# Altium PCB Master.PcbDoc
Units mil, origin at the board's own origin, x right, y up, seen from the top; angles counter-clockwise.
Board outline 6000 x 4000 mil, 2 copper layers (Top Layer, Bottom Layer); 26 components, 32 nets, 130 pads, 0 vias.
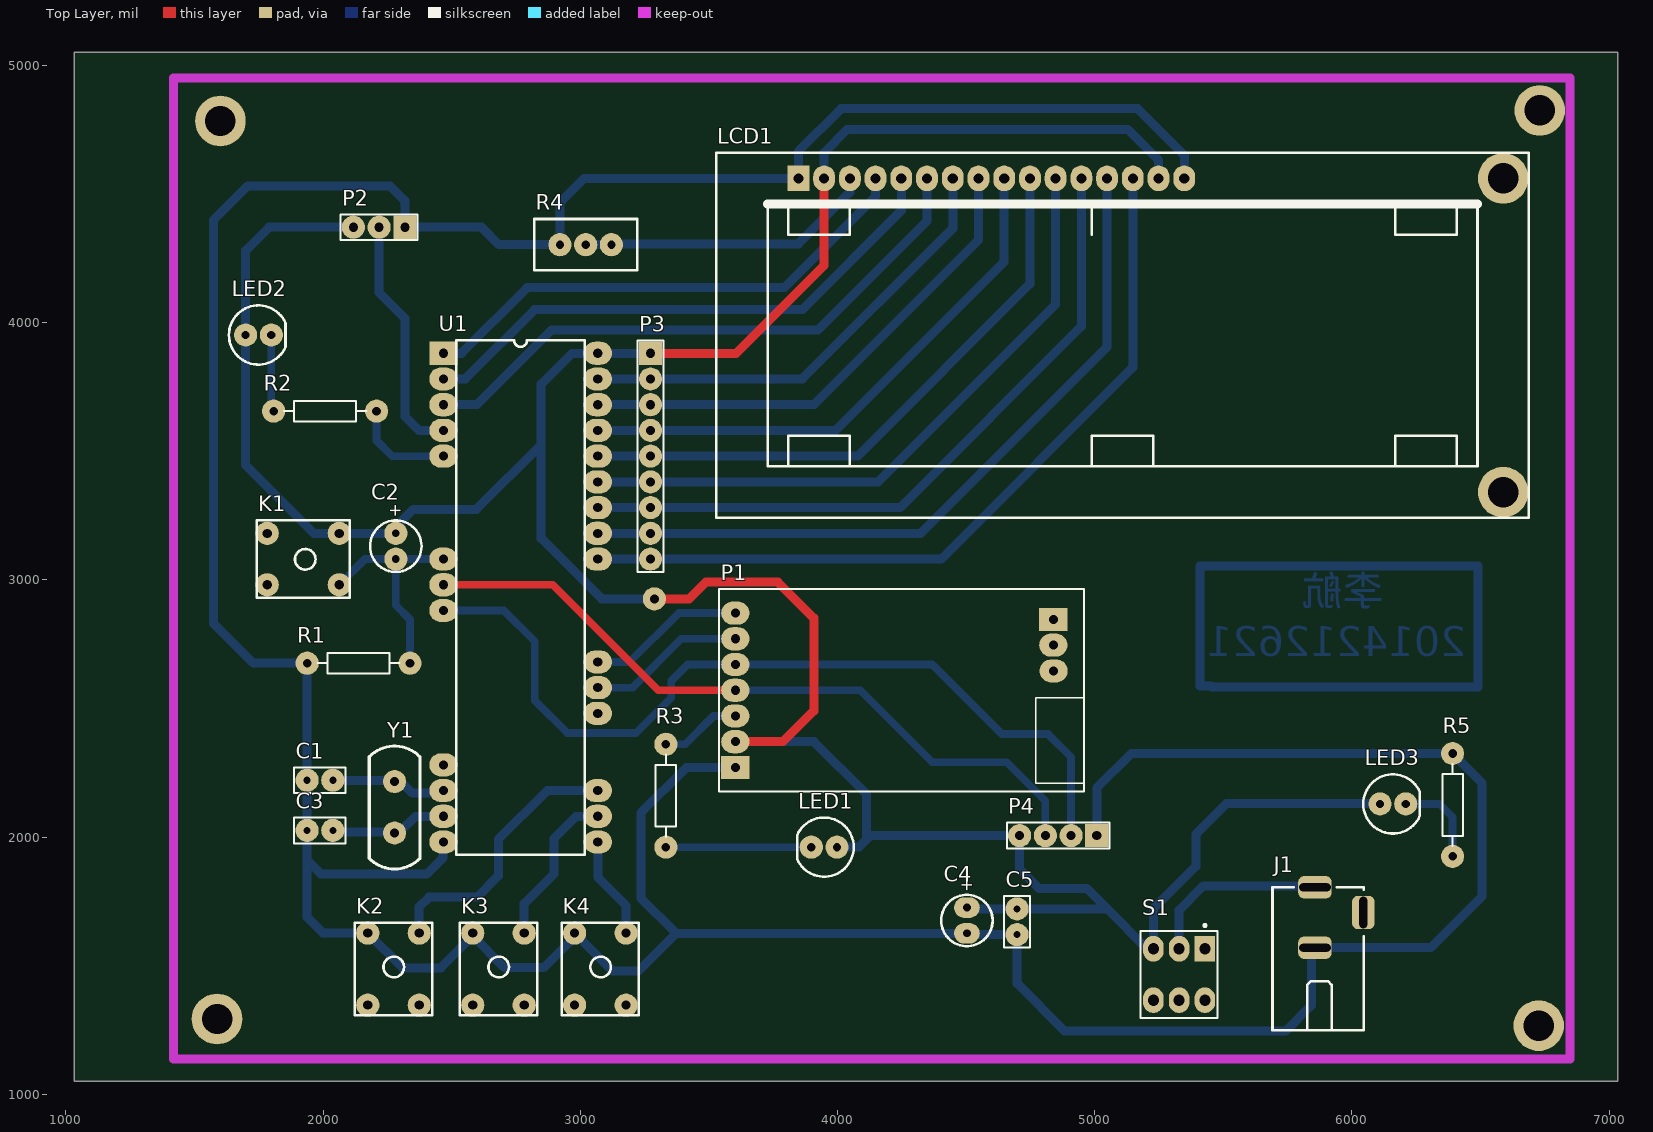
[diagram p0: Top Layer view]
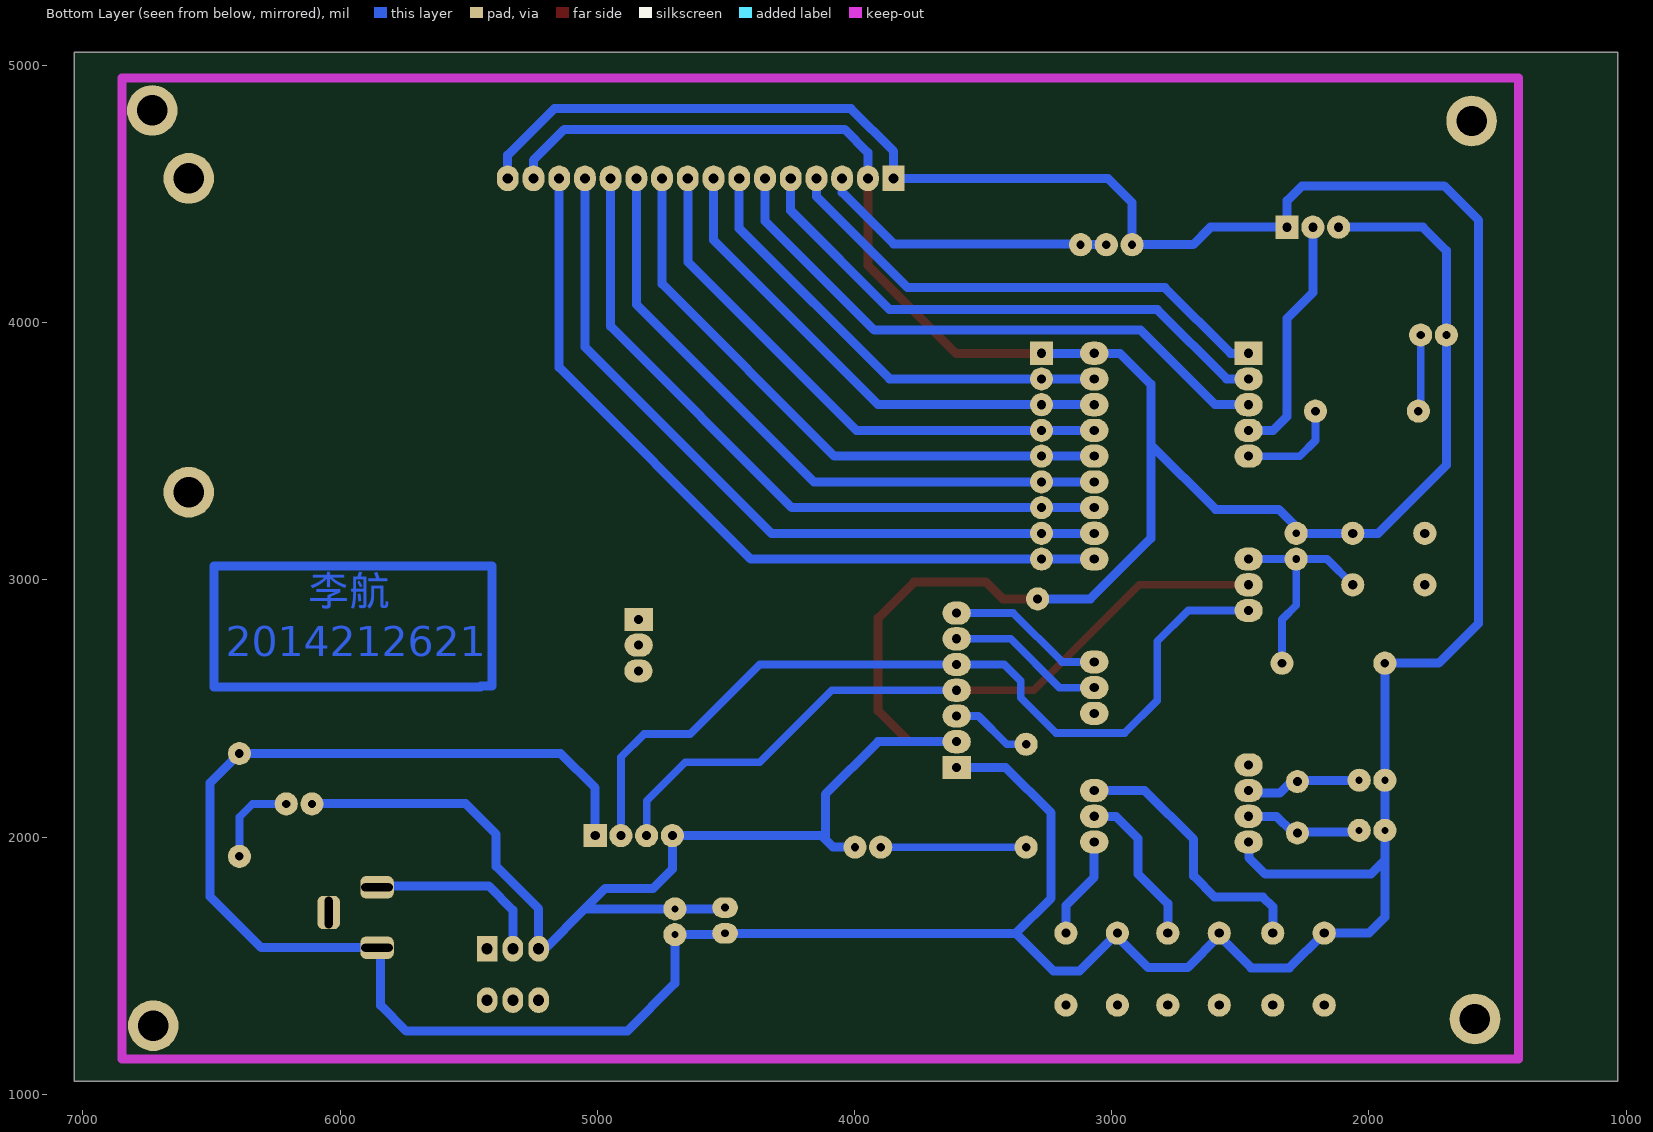
[diagram p1: Bottom Layer view, seen from below]

## Layer stack, top to bottom
Top Layer: signal copper 1.4
Dielectric: dielectric 12.6, FR-4, Dk 4.8
Bottom Layer: signal copper 1.4

## Board outline
1033,1051 7033,1051 7033,5051 1033,5051

## Design rules (kind name [scope] priority, off if disabled: settings)
Clearance [All] p1: gap=10
PolygonConnect [All] p1: connectstyle=Relief reliefconductorwidth=10 reliefentries=4 polygonreliefangle="90 Angle" airgapwidth=10
RoutingVias [All] p1: holewidth=28 width=50 viastyle="Through Hole" minholewidth=28 minwidth=50 maxholewidth=28 maxwidth=50
SolderMaskExpansion [All] p1: expansion=4
Width [All] p1: maxlimit=40 minlimit=10 preferedwidth=30
28 further rules are at their usual default settings.

## Components (designator, comment, footprint, x,y, rotation, side; value= is the part's Value field where it differs from the comment)
C1 "Cap" RAD-0.1 1988,2221 r180 top
C2 "Cap Pol1" RB.1/.2#1 2283,3131 r90 top
C3 "Cap" RAD-0.1 1988,2026 r180 top
C4 "Cap Pol1" RB.1/.2#2 4503,1676 r90 top
C5 "Cap" RAD-0.1 4698,1671 r90 top
J1 "DC-05" DC-05 5856,1805 r0 top
K1 "四脚按键" 四脚按键 2063,3181 r270 top locked
K2 "四脚按键" 四脚按键 2174,1627 r0 top
K3 "四脚按键" 四脚按键 2582,1627 r0 top
K4 "四脚按键" 四脚按键 2978,1627 r0 top
LCD1 "LCD1602" LCD1602 3848,4561 r0 top
LED1 "LED" LED 3998,1961 r180 top
LED2 "LED" LED 1699,3952 r0 top
LED3 "LED" LED 6109,2129 r0 top
P1 "无线串口模块" AS32-TTL-100 3603,2271 r0 top
P2 "蜂鸣器" HDR1X3 2318,4371 r180 top
P3 "排阻" HDR1X9 3273,3881 r270 top
P4 "Header 4" HDR1X4 5008,2006 r180 top
R1 "Res2" AXIAL-0.4 2138,2676 r0 top
R2 "Res2" AXIAL-0.4 2008,3656 r180 top
R3 "Res2" AXIAL-0.4 3333,2161 r270 top
R4 "RPot" RPot 3121,4303 r180 top (schematic designator R?)
R5 "Res2" AXIAL-0.4 6391,2125 r90 top
S1 "SW-DPDT" SWITCH_B1 5328,1466 r270 top
U1 "STC89C51" DIP-40 2468,3881 r0 top
Y1 "XTAL" XTAL 2278,2116 r90 top (schematic designator 1)

## Footprints (in the part's own frame and the unit in brackets; to place one, negate y for a bottom-side part, rotate by r counter-clockwise, add the part's x,y. Pads: shape width x height; smd on the part's side, far side on the other; paste and mask are expansions set on the pad)
AS32-TTL-100 [mil]
  rect 110x90 hole 35.43 mask+1.97: 1(0,0) 1(1236.22,575.59)
  oval 110x90 hole 35.43 mask+1.97: 2(0,100) 2(1236.22,475.59) 3(0,200) 4(0,300) 5(0,400) 6(0,500) 7(0,600)
  silkscreen extent -63,-94 1355,694
AXIAL-0.4 [mil] "Axial Device, Thru-Hole; 2 Leads; 0.4 in Pin Spacing"
  round 90 hole 33.46: 1(-200,0) 2(200,0)
  silkscreen extent -160,-40 160,40
DC-05 [mil]
  rrect50% 129.92x86.61 hole 30 slot 122.05 at 0 deg: 1(0,0) 2(0,-235)
  rrect50% 86.61x129.92 hole 30 slot 122.05 at 90 deg: 3(188,-98)
  silkscreen extent -165,-555 190,0
DIP-40 [mil]
  rect 110x90 hole 35.43: 1(0,0)
  oval 110x90 hole 35.43: 2(0,-100) 3(0,-200) 4(0,-300) 5(0,-400) 9(0,-800) 10(0,-900) 11(0,-1000) 17(0,-1600) 18(0,-1700) 19(0,-1800) 20(0,-1900) 21(600,-1900) 22(600,-1800) 23(600,-1700) 26(600,-1400) 27(600,-1300) 28(600,-1200) 32(600,-800) 33(600,-700) 34(600,-600) 35(600,-500) 36(600,-400) 37(600,-300) 38(600,-200) 39(600,-100) 40(600,0)
  silkscreen extent 50,-1950 550,50
HDR1X3 [mil] "Connector; Header; 3 Position"
  rect 90x90 hole 35.43: 1(0,0)
  round 90 hole 35.43: 2(100,0) 3(200,0)
  silkscreen extent -50,-50 250,50
HDR1X4 [mil] "Connector; Header; 4 Position"
  rect 90x90 hole 35.43: 1(0,0)
  round 90 hole 35.43: 2(100,0) 3(200,0) 4(300,0)
  silkscreen extent -50,-50 350,50
HDR1X9 [mil] "Connector; Header; 9 Position"
  rect 90x90 hole 35.43: 1(0,0)
  round 90 hole 35.43: 2(100,0) 3(200,0) 4(300,0) 5(400,0) 6(500,0) 7(600,0) 8(700,0) 9(800,0)
  silkscreen extent -50,-50 850,50
LCD1602 [mm]
  round 5 hole 3: 0(69.596,-30.988) 0(69.596,0)
  rect 2.159x2.54 hole 1: 1(0,0)
  oval 2.159x2.54 hole 1: 2(2.54,0) 3(5.08,0) 4(7.62,0) 5(10.16,0) 6(12.7,0) 7(15.24,0) 8(17.78,0) 9(20.32,0) 10(22.86,0) 11(25.4,0) 12(27.94,0) 13(30.48,0) 14(33.02,0) 15(35.56,0) 16(38.1,0)
  silkscreen extent -8.13,-33.53 72.14,2.54
LED [mil]
  round 90 hole 32: 1(0,0) 2(100,0)
  silkscreen extent -65,-115 155,115
RAD-0.1 [mil] "Radial Cap, Thru-Hole; 2 Leads; 0.1 in Pin Spacing"
  round 90 hole 27.56: 1(-50,0) 2(50,0)
  silkscreen extent -100,-50 100,50
RB.1/.2#1 [mil]
  round 90 hole 30: 1(50,0) 2(-50,0)
  silkscreen extent -100,-100 100,100
RB.1/.2#2 [mil]
  oval 80x100 hole 30: 1(50,0) 2(-50,0)
  silkscreen extent -100,-100 100,100
RPot [mil] "RPot"
  round 90 hole 32: 1(0,0) 2(100,0) 3(200,0)
  silkscreen extent -100,-100 300,100
SWITCH_B1 [mil] "单刀"
  rect 100x80 hole 43.31: 1(-100,100)
  oval 100x80 hole 43.31: 2(-100,0) 3(-100,-100) 4(100,-100) 5(100,0)
  silkscreen extent -195,-150 169,150
XTAL [mil]
  round 90 hole 35.43: 1(-100,0) 2(100,0)
  silkscreen extent -240,-100 238,100
四脚按键 [mil]
  round 90 hole 35.43: 1(0,0) 2(200,0) 3(0,-280) 4(200,-280)
  silkscreen extent -50,-320 250,40

## Part data
C1 C3 C5: "Capacitor"
C2 C4: "Polarized Capacitor (Radial)"
P1: library part "Header 7", "Header, 7-Pin"
P2: library part "Header 3", "Header, 3-Pin"
P3: library part "Header 9", "Header, 9-Pin"
P4: "Header, 4-Pin"
R1 R2 R3 R5: "Resistor"
R4: library part RPOT
S1: "单刀双掷开关"
Y1: "Crystal Oscillator"

## Free pads (board coordinates)
  round 196.85 hole 118.11: 1(1601,4784) 2(6730,4825) 3(1588,1293) 4(6726,1267)
  round 90 hole 35: 1(3288,2926)
  oval 110x90 hole 35.43: 3(4840,2646)
  oval 80x100 hole 43.31: 6(5428,1366)

## Nets (pads, with @x,y where several pads share a name; then routed paths per layer and width w, separated by ;. In a path a pad name is that pad's centre, name@x,y a point inside that pad or via, vN(x,y) a via of type N, cw(c..) or ccw(c..) an arc to the next point about the centre after c; other vN are vias at no path point)
5V: J1.1 S1.2 | length 719.3
  Bottom Layer w35: S1.2 5328,1716 5422.37,1810.37 5850.63,1810.37 J1.1
AUX: P1.3 R3.1 | length 306.8
  Bottom Layer w30: R3.1@3363,2361 3408,2361 3518,2471 P1.3 P1.3@3588,2486
BEEP: P2.2 U1.4 | length 949.2
  Bottom Layer w35: P2.2 2218,4117 2319,4016 2319,3635 2373,3581 U1.4
D0: LCD1.7 P3.2 U1.39 | length 1817.3
  Bottom Layer w35: U1.39 P3.2 3863,3781 4448,4366 LCD1.7
D1: LCD1.8 P3.3 U1.38 | length 1985.1
  Bottom Layer w35: U1.38 P3.3 3908,3681 4548,4321 LCD1.8
D2: LCD1.9 P3.4 U1.37 | length 2176.3
  Bottom Layer w35: U1.37 P3.4 3993,3581 4648,4236 LCD1.9
D3: LCD1.10 P3.5 U1.36 | length 2367.5
  Bottom Layer w35: U1.36 P3.5 4078,3481 4748,4151 LCD1.10
D4: LCD1.11 P3.6 U1.35 | length 2555.8
  Bottom Layer w35: U1.35 P3.6 4158,3381 4848,4071 LCD1.11
D5: LCD1.12 P3.7 U1.34 | length 2747
  Bottom Layer w35: U1.34 P3.7 4243,3281 4948,3986 LCD1.12
D6: LCD1.13 P3.8 U1.33 | length 2935.3
  Bottom Layer w35: U1.33 P3.8 4323,3181 5048,3906 LCD1.13
D7: LCD1.14 P3.9 U1.32 | length 3123.6
  Bottom Layer w35: U1.32 P3.9 4403,3081 5148,3826 LCD1.14
E: LCD1.6 U1.3 | length 2341.2
  Bottom Layer w35: U1.3 2598,3681 2888,3971 3923,3971 4348,4396 LCD1.6
GND: C1.2 C3.2 C4.2 C5.1 J1.2 K2.1 K3.1 K4.1 LCD1.1 LCD1.16 P1.1@3603,2271 P2.1 P4.1 R1.1 R4.3 R5.2 U1.20 | length 16889.3
  Bottom Layer w35: U1.20@2467,1976 2467,1920 2403,1856 1993,1856 1938,1911 ; P1.1@3603,2271 3413,2271 3236,2094 3236,1763 3373,1626 ; P4.1 5008,2191 5142,2325 R5.2 6506,2210 6506,1770 6306,1570 J1.2 5842,1556 5842,1346 5742,1246 4883,1246 4698,1431 C5.1 4498,1621 C4.2 3373,1626 ; LCD1.16@5348,4561.47 5348,4651 5167,4832 4014,4832 3848,4666 LCD1.1 3015,4561 2921,4467 R4.3 2684,4303 2616,4371 P2.1 2318,4474 2260,4532 1708,4532 1574,4398 1574,2831 1729,2676 R1.1 C1.2 C3.2 1938,1911 ; 1938,1911 1938,1689 2000,1627 K2.1 2309,1492 2458,1492 2582,1616 2705,1493 2858,1493 2978,1613 K4.1 3125,1480 3227,1480 3373,1626
KEY1: K2.2 U1.23 | length 1066.4
  Bottom Layer w35: K2.2 2374,1729 2412,1767 2600,1767 2682,1849 2682,1991 2872,2181 U1.23
KEY2: K3.2 U1.22 | length 621.7
  Bottom Layer w35: K3.2 2782,1741 2898,1857 2898,1995 2984,2081 U1.22
KEY3: K4.2 U1.21 | length 399.6
  Bottom Layer w35: U1.21 3068,1844 3178,1734 K4.2
LED1: R2.1 U1.5 | length 399.3
  Bottom Layer w30: R2.1 2208,3542 2269,3481 U1.5
M0: P1.7 U1.28 | length 613.7
  Bottom Layer w30: U1.28 3193,2681 3383,2871 P1.7
M1: P1.6 U1.27 | length 613.7
  Bottom Layer w30: U1.27 3203,2581 3393,2771 P1.6
NetC2_2: 
NetLED1_2: LED1.2 R3.2 | length 565
  Bottom Layer w30: R3.2 LED1.2
NetLED2_2: LED2.2 R2.2 | length 299.7
  Bottom Layer w30: LED2.2 1799,3665 R2.2
NetLED3_2: LED3.2 R5.1 | length 356.1
  Bottom Layer w30: LED3.2 6340,2129 6391,2078 R5.1
RESET: C2.2 K1.2 R1.2 U1.9 | length 874.2
  Bottom Layer w30: K1.2 2163,3081 C2.2 ; R1.2 2338,2846 2283,2901 C2.2 ; U1.9 C2.2
RS: LCD1.4 U1.1 | length 2026.8
  Bottom Layer w30: U1.1@2468,3871 2478,3871 U1.1
  Bottom Layer w35: U1.1 2538,3881 2793,4136 3793,4136 4148,4491 LCD1.4
RW: LCD1.5 U1.2 | length 2176.3
  Bottom Layer w35: U1.2 2553,3781 2823,4051 3863,4051 4248,4436 LCD1.5
RX: P1.4 P4.3 U1.10 | length 2822.9
  Top Layer w30: U1.10 2893,2981 3303,2571 P1.4
  Bottom Layer w30: P1.4 4088,2571 4368,2291 4658,2291 4808,2141 P4.3
TX: P1.5 P4.2 U1.11 | length 3374.3
  Bottom Layer w30: U1.11 2703,2881 2823,2761 2823,2531 2949,2405 3217,2405 3354,2542 3354,2607 3418,2671 P1.5 4368,2671 4638,2401 4818,2401 4908,2311 P4.2
VCC: C2.1 C4.1 C5.2 K1.1 LCD1.2 LCD1.15 LED1.1 LED2.1 LED3.1 P1.2@3603,2371 P2.3 P3.1 P4.4 pad.1@3288,2926 S1.3 U1.40 | length 12528.8
  Top Layer w35: P3.1 3606,3881 3948,4223 LCD1.2 ; pad.1@3288,2926 3423,2926 3488,2991 3768,2991 3908,2851 3908,2491 3788,2371 P1.2@3603,2371 ; C4.1 C4.1@4508,1721
  Bottom Layer w35: P2.3 1790,4371 1699,4280 LED2.1 1699,3446 1964,3181 K1.1 C2.1 ; C2.1@2283,3206 2351,3274 2596,3274 2848,3526 ; P3.1 U1.40 2968,3881 2848,3761 2848,3526 ; pad.1@3288,2926 3083,2926 2848,3161 2848,3526 ; P1.2@3603,2371 3908,2371 4113,2166 4113,1991 ; LCD1.2 3948,4661 4038,4751 5128,4751 5248,4631 LCD1.15@5248,4561.47 ; LED1.1 4083,1961 4113,1991 ; C4.1@4508,1721 C5.2 5048,1721 ; LED3.1 6107,2131 5513,2131 5393,2011 5393,1886 5228,1721 S1.3 5203,1566 5048,1721 ; 4113,1991 4128,2006 P4.4 4708,1876 4783,1801 4968,1801 5048,1721
VO: LCD1.3 R4.1 R4.2 | length 1143.3
  Bottom Layer w35: R4.2 R4.1 ; R4.1@3143,4306 3848,4306 4048,4506 LCD1.3 LCD1.3@4048,4560.53
XTAL1: C3.1 U1.19 Y1.1 | length 457.8
  Bottom Layer w30: C3.1 C3.1@2044,2020
  Bottom Layer w35: C3.1@2044,2020 2299,2020 2360,2081 U1.19
XTAL2: C1.1 U1.18 Y1.2 | length 454.9
  Bottom Layer w30: U1.18@2458,2171 U1.18
  Bottom Layer w35: C1.1 2297,2221 2347,2171 U1.18@2458,2171
pads on no net: J1.3 K1.3 K1.4 K2.3 K2.4 K3.3 K3.4 K4.3 K4.4 LCD1.0 P1.1@4839.22,2846.59 P1.2@4839.22,2746.59 S1.1 S1.4 S1.5 U1.17 U1.26
copper on no net: | length 3113.2
  Bottom Layer w35: 6489,2989 6489,3054 5409,3054 5409,2587 5451,2587 5454,2584 6489,2584 6489,3004

## Keep-outs
Keep-Out Layer:
  lines w35: 1419,1138 1419,4951 6848,4951 6848,1138 1419,1138

## Other copper
Bottom Layer:
  text "李航" at 6124,2862 h200
  text "2014212621" at 6444,2664 h200

## Dimensions
1419,4951 to 1419,1138 on Top Overlay
1419,1138 to 6848,1138 on Top Overlay

## Text inside footprints (layer, text, board x,y; h text height)
C2: Top Overlay "+" at 2303,3241 h48 r90
C4: Top Overlay "+" at 4523,1786 h48 r90